# Altium PCB Game Joystick 510.PcbDoc (part 1 of 2)
Units mil, origin at the board's own origin, x right, y up, seen from the top; angles counter-clockwise.
Board outline 4889.97 x 4392.01 mil, 2 copper layers (Top Layer, Bottom Layer); 77 components, 82 nets, 383 pads, 99 vias.
Unrouted connection lines stored in the file: 79.
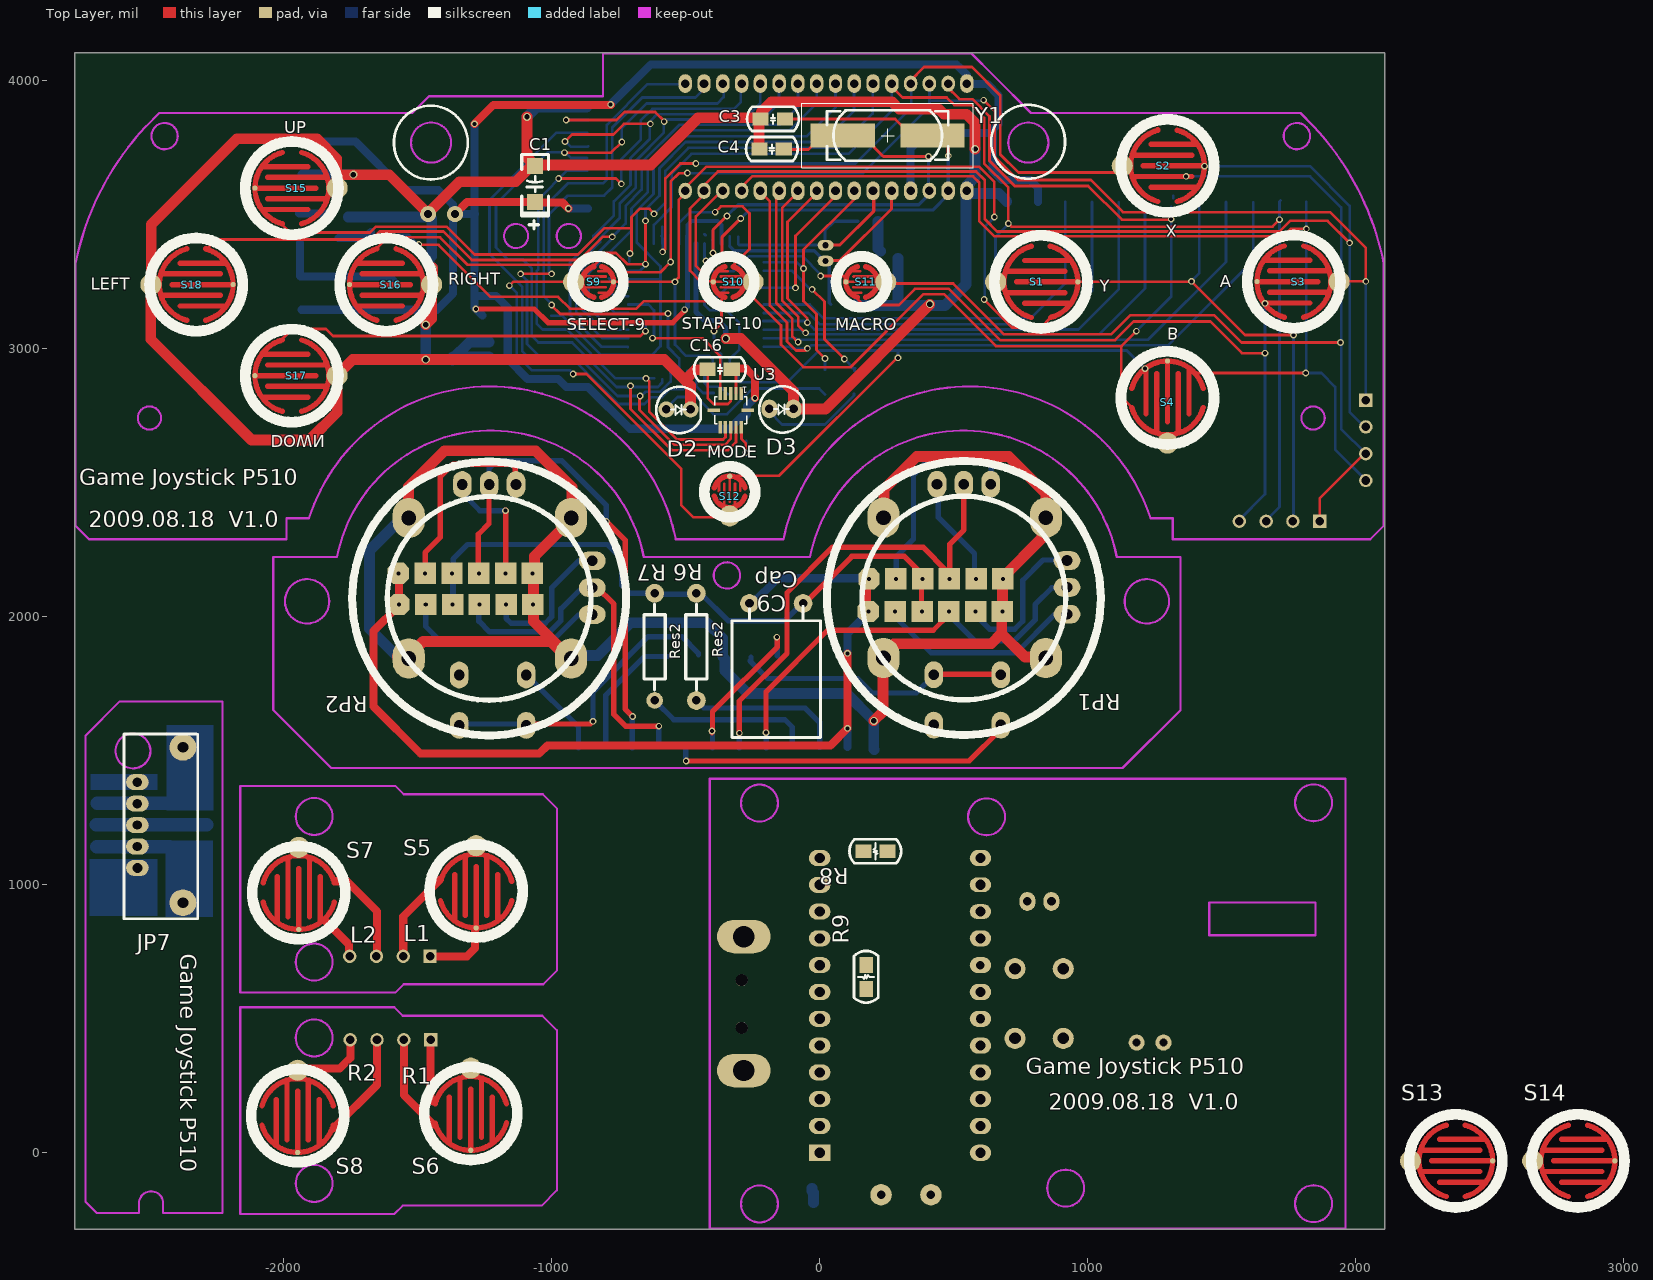
[diagram p0: Top Layer view]
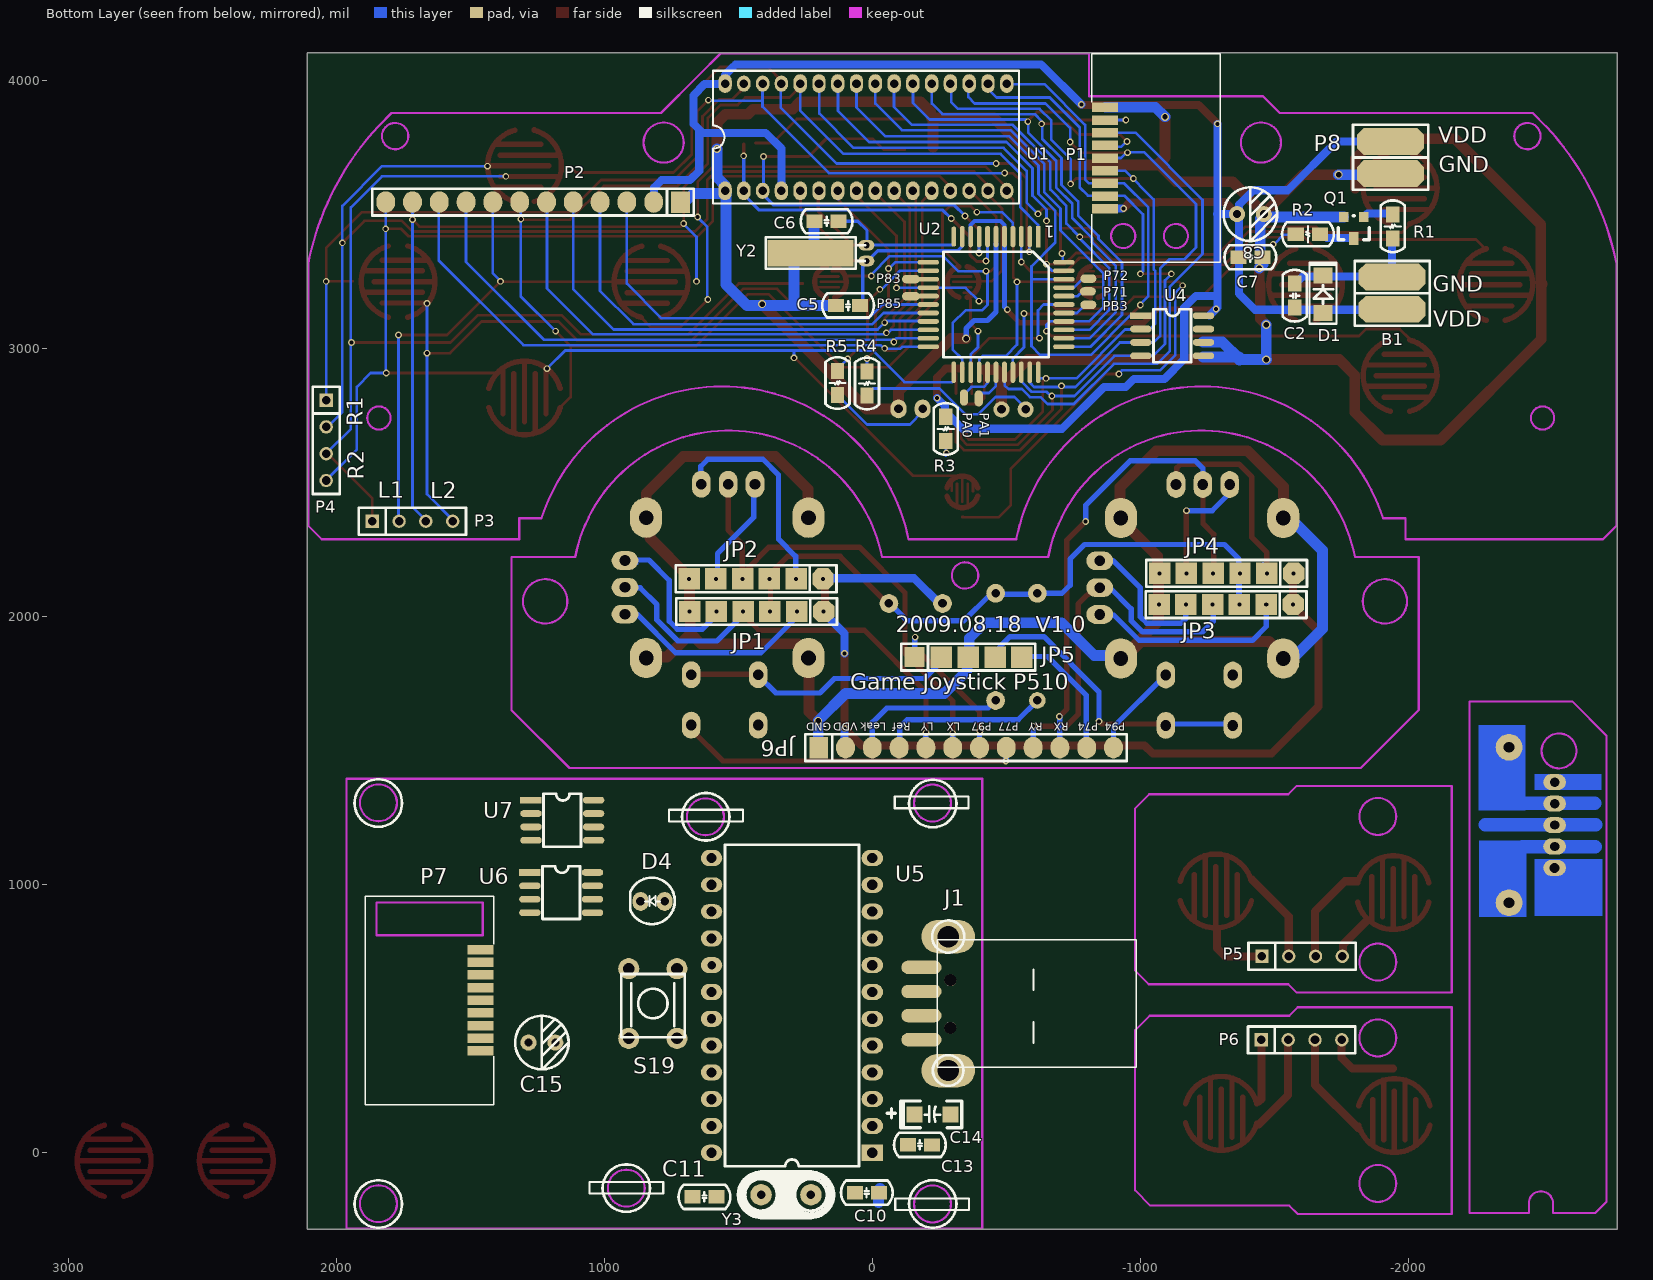
[diagram p1: Bottom Layer view, seen from below]

## Layer stack, top to bottom
Top Layer: signal copper 1.4
Dielectric: dielectric 12.6, FR-4, Dk 4.8
Bottom Layer: signal copper 1.4

## Board outline
-2780.8,-286 2109.17,-286 2109.17,4106.01 -2780.8,4106.01

## Design rules (kind name [scope] priority, off if disabled: settings)
Clearance [All] p1: gap=8
ComponentClearance [All] p1: gap=2 collisioncheckmode=3 verticalgap=10 showdistances=FALSE
FanoutControl Fanout_LCC [All] p1 off: bgadir=Out bgaviamode=Centered fanoutstyle=Auto fanoutdirection=Alternating viagrid=1 // Protel DXP Scope 1 Expression Was: IsLCC   Fanout_LCC (Default Rule)
FanoutControl Fanout_BGA [All] p2 off: bgadir=Out bgaviamode=Centered fanoutstyle=Auto fanoutdirection=Alternating viagrid=1 // Protel DXP Scope 1 Expression Was: IsBGA   Fanout_BGA (Default Rule)
FanoutControl Fanout_SOIC [All] p3 off: bgadir=Out bgaviamode=Centered fanoutstyle=Auto fanoutdirection=Alternating viagrid=1 // Protel DXP Scope 1 Expression Was: IsSOIC   Fanout_SOIC (Default Rule)
FanoutControl Fanout_Default [All] p4: bgadir=Out bgaviamode=Centered fanoutstyle=Auto fanoutdirection=Alternating viagrid=1 // Fanout_Default (Default Rule)
FanoutControl Fanout_Small [All] p5 off: bgadir=Out bgaviamode=Centered fanoutstyle=Auto fanoutdirection=Alternating viagrid=1 // Protel DXP Scope 1 Expression Was: (CompPinCount < 5)   Fanout_Small (Default Rule)
PolygonConnect [All] p1: connectstyle=Relief reliefconductorwidth=10 reliefentries=4 polygonreliefangle="90 Angle"
RoutingVias [All] p1: holewidth=15 width=25 viastyle="Through Hole" minholewidth=15 minwidth=25 maxholewidth=20 maxwidth=30
SilkscreenOverComponentPads [All] p1: minsilkscreentomaskgap=10
SolderMaskExpansion [All] p1: expansion=4
TestPointUsage [All] p1: valid=0 allowmultiple=FALSE
Testpoint [All] p1: side=15 testpointundercomponent=TRUE minsize=40 maxsize=100 preferedsize=60 minholesize=0 maxholesize=40 preferedholesize=32 testpointgrid=1 style=1023 order=0123456789
Width [All] p1: maxlimit=50 minlimit=8 preferedwidth=10
17 further rules are at their usual default settings.

## Classes and differential pairs
component class EM78P510_EM198810: B1 C1 C2 C3 C4 C5 C6 C7 C8 C16 D1 D2 D3 JP7 P1 P2 P3 P4 P5 P6 P8 Q1 R1 R2 R3 R4 R5 S1 S2 S3 S4 S5 S6 S7 S8 S9 S10 S11 S12 S13 S14 S15 S16 S17 S18 u1 U2 U3 U4 Y1 Y2
component class "Game Joystick rocker": C9 JP1 JP2 JP3 JP4 JP5 JP6 R6 R7 RP1 RP2
component class EM78M611RX: C10 C11 C12 C13 C14 C15 D4 J1 P7 R8 R9 S19 U5 U6 U7 Y3

## Components (designator, comment, footprint, x,y, rotation, side; value= is the part's Value field where it differs from the comment)
B1 "Motor" SIP2 -1940.06,3158.01 r90 bottom
C1 "Cap Pol1" C1206-2 -1062.06,3548.01 r90 top
C2 "Cap" C0805 -1576.06,3244.01 r270 bottom
C3 "Cap" C0805 -220.06,3858.01 r0 top
C4 "Cap" C0805 -224.06,3746.01 r0 top
C5 "Cap" C0805 135.94,3162.01 r180 bottom
C6 "Cap" C0805 215.94,3476.01 r180 bottom
C7 "Cap" C0805 -1456.06,3342.01 r0 bottom
C8 "Cap Pol1" RB5 -1360.9,3502.76 r180 bottom
C9 "Cap" CAPL -162,2050 r0 top
C10 "Cap" c0805 -24.9,-148.76 r0 bottom
C11 "Cap" c0805 581.1,-164.76 r0 bottom
C13 "Cap" c0805 -222.9,29.24 r0 bottom
C14 "Cap Pol1" C1206-2 -156.9,143.24 r180 bottom
C15 "Cap Pol1" RB5 1283.1,411.24 r180 bottom
C16 "Cap" C0805 -418.06,2924 r0 top
D1 "4148" D1407 -1682.06,3134.01 r90 bottom
D2 "LED1" led-3#1 -482,2774 r180 top locked
D3 "LED2" LED-3 -97.67,2776.03 r180 top locked
D4 "LED" led-3#2 865,937.9 r180 bottom
J1 "353576-1" USBSD -208.06,702.01 r0 bottom locked
JP1 "HEADER 6" SIP6 182,2020 r0 bottom
JP2 "HEADER 6" SIP6 184,2142 r0 bottom
JP3 "HEADER 6" SIP6 -1570,2046 r0 bottom
JP4 "HEADER 6" SIP6 -1572,2162 r0 bottom
JP5 "HEADER 5" SIP5 -158,1850 r180 bottom
JP6 "Header 12" SIP12 200,1512 r180 bottom
JP7 "HEADER 7" CON5 -2546.19,1063.04 r180 top
P1 "Header 9H" RFM -868.06,3523.22 r90 bottom
P2 "Header 12" SIP12 716,3548 r0 bottom
P3 "L1L2" SIP4 1866,2356.76 r180 bottom
P4 "R1R2" SIP4 2038,2808.76 r270 bottom
P5 "L1L2" SIP4 -1454,733.34 r180 bottom
P6 "R1R2" SIP4 -1452,421.34 r180 bottom
P7 "Header 9H" rfm 1462,758 r270 bottom
P8 "POWER" SIP2 -1934.06,3764.01 r270 bottom
Q1 "8050" SOT-23 -1834.06,3492.01 r0 bottom
R1 "Res2" R0805 -1942.06,3412.01 r90 bottom
R2 "Res2" R0805 -1580.06,3428.01 r180 bottom
R3 "Res2" R0805 -274,2746.76 r270 bottom
R4 "Res2" R0805 19.94,2916.01 r270 bottom
R5 "Res2" R0805 129.94,2918.01 r270 bottom
R6 "Res2" AXIAL0.4#1 -460,1688 r90 top
R7 "Res2" AXIAL0.4#2 -616,1688 r90 top
R8 "Res2" R0805 253.1,1125.24 r180 top
R9 "Res2" R0805 173.1,611.24 r90 top
RP1 "Rocker" Rocker 238,2370 r180 top locked
RP2 "Rocker" Rocker -1533.4,2368.9 r180 top locked
S1 "Y" KeyPad1#1 963.35,3250.03 r0 top locked
S2 "X" KeyPad1#2 1435.8,3683.1 r0 top locked
S3 "A" KeyPad1#3 1631.8,3251.1 r180 top locked
S4 "B" KeyPad1#4 1298,2954.76 r90 top locked
S5 "L1-5" KeyPad1#5 -1282,839.24 r270 top
S6 "R1-6" KeyPad1#6 -1302,9.24 r270 top
S7 "L2-7" KeyPad1#6 -1944,833.24 r270 top
S8 "R2-8" KeyPad1#6 -1948,1.24 r270 top
S9 "SELECT-9" KeyPad2#1 -769.65,3250.03 r0 top locked
S10 "START-10" KeyPad2#2 -397,3250 r180 top
S11 "MACRO" KeyPad2#3 98.06,3250.03 r180 top locked
S12 "MODE" KeyPad2#4 -335.8,2524.83 r90 top locked
S13 "LSW1" KeyPad1#6 2511.46,-30.07 r0 top
S14 "RSW2" KeyPad1#6 2967.46,-30.07 r0 top
S15 "UP" KeyPad1#6 -2107.51,3599.95 r180 top locked
S16 "RIGHT" KeyPad1#6 -1754.6,3239.95 r180 top locked
S17 "DOWN" KeyPad1#6 -2107.51,2899.95 r180 top locked
S18 "LEFT" KeyPad1#1 -2189.01,3239.95 r0 top locked
S19 "RES" SW-PB 729,687 r270 bottom locked
U1 "EM78P510" SDIP32 549.51,3590.03 r180 bottom locked
U2 "EM78P510" QFP44 -462.06,3166.01 r0 bottom locked
U3 "BA020" LCC12 -332,2770.76 r180 top locked
U4 "93C46" SOP8 -1002.06,3124.01 r270 bottom
U5 "EM78M611" DIP24 0,0 r0 bottom locked
U6 "24C02" sop8 1277.94,1046.01 r270 bottom
U7 "93C46" sop8 1273.94,1316.01 r270 bottom
Y1 "4M" XTAL1 345.94,3796.01 r180 top
Y2 "32768" XTAL2 21.94,3328.01 r90 bottom
Y3 "6M" CRY 229.1,-156.76 r0 bottom

## Footprints (in the part's own frame and the unit in brackets; to place one, negate y for a bottom-side part, rotate by r counter-clockwise, add the part's x,y. Pads: shape width x height; smd on the part's side, far side on the other; paste and mask are expansions set on the pad)
AXIAL0.4#1 [mil]
  round 70 hole 32: 1(0,0) 2(400,0)
  silkscreen extent 40,-40 360,40
AXIAL0.4#2 [mil]
  round 62 hole 32: 1(0,0)
  round 70 hole 32: 2(400,0)
  silkscreen extent 40,-40 360,40
C0805 [mil]
  rect 60x50 smd: 1(0,0) 2(90.01,-0.01)
  silkscreen extent -51,-45 142,45
c0805 [mil]
  rect 60x50 smd: 1(0,0) 2(90.01,-0.01)
  silkscreen extent -51,-45 142,45
C1206-2 [mil]
  rect 60x60 smd: 1(0,0) 2(135,0)
  silkscreen extent -101,-50 177,50
CAPL [mil]
  round 70 hole 32: 1(100,0) 2(-100,0)
  silkscreen extent -165,-500 165,-10
CON5 [mil]
  oval 85x60 hole 38: 1(0,0)
  oval 85x60 hole 35: 2(0,-80) 3(0,-160) 4(0,-240) 5(0,-320)
  round 100 hole 40: 6(-170,130) 7(-170,-450)
  silkscreen extent -225,-500 50,190
CRY [mil]
  round 80 hole 32: 1(0,0) 2(186,0)
  silkscreen extent -85,-85 271,85
D1407 [mil]
  rect 60x70 smd: 1(0,0) 2(140,0)
  silkscreen extent -40,-50 188,50
DIP24 [mil]
  rect 80x60 hole 38: 1(0,0)
  oval 80x60 hole 38: 2(0,-100) 3(0,-200) 4(0,-300) 5(0,-400) 6(0,-500) 7(0,-600) 8(0,-700) 9(0,-800) 10(0,-900) 11(0,-1000) 12(0,-1100) 13(600,-1100) 16(600,-800) 18(600,-600) 20(600,-400) 21(600,-300) 22(600,-200) 23(600,-100) 24(600,0)
  oval 80x55 hole 38: 14(600,-1000) 15(600,-900)
  oval 80x60 hole 32: 17(600,-700)
  oval 80x60 hole 35: 19(600,-500)
  silkscreen extent 50,-1150 550,50
KeyPad1#1 [mm]
  round 0.5 smd: 1(0,0)
  round 2 smd: 2(-7.79,0)
  Top Layer lines w0.508: -6.675,-1.016 -1.214,-1.016 ; -6.675,1.016 -1.214,1.016 ; -5.786,0 -0.071,0 ; -5.024,-2.032 -0.796,-2.032 -0.706,-2.032 ; -5.024,2.032 -0.706,2.032 ; -4.409,-3.38 cw(c-3.5,0) -4.409,3.38 ; -2.597,3.381 cw(c-3.5,0) 0,0 cw(c-3.5,0) -0.674,-2.064 cw(c-3.5,0) -0.742,-2.155 cw(c-3.5,0) -0.796,-2.223 cw(c-3.5,0) -1.723,-3.016 cw(c-3.5,0) -2.198,-3.249 cw(c-3.5,0) -2.536,-3.365 cw(c-3.5,0) -2.591,-3.38
  silkscreen extent -7.91,-4.41 0.91,4.41
KeyPad1#2 [mm]
  round 0.5 smd: 1(0,0)
  round 2 smd: 2(-7.79,0)
  Top Layer lines w0.508: -6.675,-1.016 -1.723,-1.016 -1.214,-1.016 ; -6.675,1.016 -1.214,1.016 ; -5.786,0 -0.071,0 ; -5.024,-2.032 -0.796,-2.032 -0.706,-2.032 ; -5.024,2.032 -0.706,2.032 ; -4.409,-3.38 cw(c-3.5,0) -4.409,3.38 ; -2.597,3.381 cw(c-3.5,0) 0,0 cw(c-3.5,0) -0.674,-2.064 cw(c-3.5,0) -0.742,-2.155 cw(c-3.5,0) -0.796,-2.223 cw(c-3.5,0) -1.723,-3.016 cw(c-3.5,0) -2.198,-3.249 cw(c-3.5,0) -2.591,-3.38
  silkscreen extent -7.91,-4.41 0.91,4.41
KeyPad1#3 [mm]
  round 0.5 smd: 1(0,0)
  round 2 smd: 2(-7.79,0)
  Top Layer lines w0.508: -0.071,0 -5.786,0 ; -0.706,2.032 -0.766,2.032 -0.794,2.032 -2.849,2.032 -5.024,2.032 ; -0.706,-2.032 -0.796,-2.032 -5.024,-2.032 ; -1.214,1.016 -6.675,1.016 ; -1.214,-1.016 -6.675,-1.016 ; -2.591,-3.38 ccw(c-3.5,0) -2.198,-3.249 ccw(c-3.5,0) -1.723,-3.016 ccw(c-3.5,0) -0.796,-2.223 ccw(c-3.5,0) -0.742,-2.155 ccw(c-3.5,0) -0.674,-2.064 ccw(c-3.5,0) 0,0 ccw(c-3.5,0) -2.597,3.381 ; -4.409,3.38 ccw(c-3.5,0) -4.409,-3.38
  silkscreen extent -7.91,-4.41 0.91,4.41
KeyPad1#4 [mm]
  round 0.5 smd: 1(0,0)
  round 2 smd: 2(-7.79,0)
  Top Layer lines w0.508: -2.597,3.381 cw(c-3.5,0) 0,0 cw(c-3.5,0) -0.674,-2.064 cw(c-3.5,0) -0.742,-2.155 cw(c-3.5,0) -0.796,-2.223 cw(c-3.5,0) -1.137,-2.582 cw(c-3.5,0) -1.723,-3.016 cw(c-3.5,0) -2.198,-3.249 cw(c-3.5,0) -2.591,-3.38 ; -4.409,3.38 ccw(c-3.5,0) -4.414,3.378 ccw(c-3.5,0) -4.409,-3.38 ; -5.024,2.032 -0.73,2.032 -0.706,2.032 ; -6.675,1.016 -1.214,1.016 ; -5.786,0 -0.071,0 ; -6.675,-1.016 -1.214,-1.016 ; -5.024,-2.032 -0.796,-2.032 -0.706,-2.032
  silkscreen extent -7.91,-4.41 0.91,4.41
KeyPad1#5 [mm]
  round 0.5 smd: 1(0,0)
  round 2 smd: 2(-7.79,0)
  Top Layer lines w0.508: -2.591,-3.38 ccw(c-3.5,0) -2.198,-3.249 ccw(c-3.5,0) -1.723,-3.016 ccw(c-3.5,0) -0.796,-2.223 ccw(c-3.5,0) -0.742,-2.155 ccw(c-3.5,0) -0.674,-2.064 ccw(c-3.5,0) 0,0 ccw(c-3.5,0) -2.597,3.381 ; -4.409,-3.38 cw(c-3.5,0) -4.409,3.38 ; -0.706,-2.032 -0.742,-2.032 -0.796,-2.032 -5.024,-2.032 ; -1.214,-1.016 -6.675,-1.016 ; -0.071,0 -5.786,0 ; -1.214,1.016 -6.675,1.016 ; -0.706,2.032 -5.024,2.032
  silkscreen extent -7.91,-4.41 0.91,4.41
KeyPad1#6 [mm]
  round 0.5 smd: 1(0,0)
  round 2 smd: 2(-7.79,0)
  Top Layer lines w0.508: -2.591,-3.38 ccw(c-3.5,0) -2.198,-3.249 ccw(c-3.5,0) -1.723,-3.016 ccw(c-3.5,0) -0.796,-2.223 ccw(c-3.5,0) -0.742,-2.155 ccw(c-3.5,0) -0.674,-2.064 ccw(c-3.5,0) 0,0 ccw(c-3.5,0) -2.597,3.381 ; -4.409,-3.38 cw(c-3.5,0) -4.409,3.38 ; -0.706,-2.032 -0.796,-2.032 -5.024,-2.032 ; -1.214,-1.016 -6.675,-1.016 ; -0.071,0 -5.786,0 ; -1.214,1.016 -6.675,1.016 ; -0.706,2.032 -5.024,2.032
  silkscreen extent -7.91,-4.41 0.91,4.41
KeyPad2#1 [mm]
  round 0.5 smd: 1(0,0)
  round 2 smd: 2(-3.77,0)
  Top Layer lines w0.254: -3.004,-0.508 -0.718,-0.508 ; -3.004,0.508 -0.718,0.508 ; -2.394,0 0,0 0.02,0 0.044,0 ; -1.421,1.016 -0.376,1.016 -0.337,1.016 ; -1.37,-1.016 -0.458,-1.016 -0.407,-1.016 -0.376,-1.016 -0.337,-1.016
  Top Layer lines w0.508: -1.87,-1.449 cw(c-1.48,0) -1.941,1.428 cw(c-1.48,0) -1.87,1.449 ; -1.093,1.449 cw(c-1.48,0) -0.376,1.016 cw(c-1.48,0) 0.02,0 cw(c-1.48,0) -0.376,-1.016 cw(c-1.48,0) -0.407,-1.048 cw(c-1.48,0) -0.416,-1.057 cw(c-1.48,0) -1.09,-1.449
  silkscreen extent -3.89,-2.41 0.93,2.41
KeyPad2#2 [mm]
  round 0.5 smd: 1(0,0)
  round 2 smd: 2(-3.77,0)
  Top Layer lines w0.254: 0.044,0 0.027,0 0.02,0 0,0 -2.394,0 ; -0.337,1.016 -0.376,1.016 -1.421,1.016 ; -0.337,-1.016 -0.376,-1.016 -0.407,-1.016 -0.458,-1.016 -1.37,-1.016 ; -0.718,0.508 -3.004,0.508 ; -0.718,-0.508 -3.004,-0.508
  Top Layer lines w0.508: -1.09,-1.449 ccw(c-1.48,0) -0.416,-1.057 ccw(c-1.48,0) -0.407,-1.048 ccw(c-1.48,0) -0.376,-1.016 ccw(c-1.48,0) 0.02,0 ccw(c-1.48,0) -0.376,1.016 ccw(c-1.48,0) -1.031,1.431 ccw(c-1.48,0) -1.093,1.449 ; -1.87,1.449 ccw(c-1.48,0) -2.034,-1.394 ccw(c-1.48,0) -1.87,-1.449
  silkscreen extent -3.89,-2.41 0.93,2.41
KeyPad2#3 [mm]
  round 0.5 smd: 1(0,0)
  round 2 smd: 2(-3.77,0)
  Top Layer lines w0.254: 0.044,0 -2.394,0 ; -0.337,1.016 -0.376,1.016 -1.421,1.016 ; -0.337,-1.016 -0.376,-1.016 -0.404,-1.016 -0.407,-1.016 -0.454,-1.016 -0.458,-1.016 -1.37,-1.016 ; -0.718,0.508 -3.004,0.508 ; -0.718,-0.508 -3.004,-0.508
  Top Layer lines w0.508: -1.09,-1.449 ccw(c-1.48,0) -0.416,-1.057 ccw(c-1.48,0) -0.407,-1.048 ccw(c-1.48,0) -0.376,-1.016 ccw(c-1.48,0) -0.258,-0.87 ccw(c-1.48,0) -0.376,1.016 ccw(c-1.48,0) -1.093,1.449 ; -1.87,1.449 ccw(c-1.48,0) -1.87,-1.449
  silkscreen extent -3.89,-2.41 0.93,2.41
KeyPad2#4 [mm]
  round 0.5 smd: 1(0,0)
  round 2 smd: 2(-3.77,0)
  Top Layer lines w0.254: -1.421,1.016 -0.376,1.016 -0.337,1.016 ; -3.004,0.508 -0.718,0.508 ; -2.394,0 0,0 0.02,0 0.044,0 ; -3.004,-0.508 -0.718,-0.508 ; -1.37,-1.016 -0.458,-1.016 -0.407,-1.016 -0.376,-1.016 -0.337,-1.016
  Top Layer lines w0.508: -1.87,1.449 ccw(c-1.48,0) -1.87,-1.449 ; -1.093,1.449 cw(c-1.48,0) -0.376,1.016 cw(c-1.48,0) 0.02,0 cw(c-1.48,0) -0.376,-1.016 cw(c-1.48,0) -0.407,-1.048 cw(c-1.48,0) -0.416,-1.057 cw(c-1.48,0) -1.09,-1.449
  silkscreen extent -3.89,-2.41 0.93,2.41
LCC12 [mm]
  rect 0.32x1.2 smd: 1(-1,-1.6) 2(-0.5,-1.6) 3(0,-1.6) 4(0.5,-1.6) 5(1,-1.6) 6(1,1.6) 7(0.5,1.6) 8(0,1.6) 9(-0.5,1.6) 10(-1,1.6)
  rect 1.2x0.32 smd: 11(-1.6,0) 12(1.6,0)
  silkscreen extent -1.52,-1.3 1.52,1.27
led-3#1 [mil]
  round 60 hole 32.01: 1(90,0) 2(0,0)
  silkscreen extent -38,-85 128,89
led-3#2 [mil]
  oval 60x70 hole 32.01: 1(90,0) 2(0,0)
  silkscreen extent -38,-85 128,89
LED-3 [mil]
  oval 60x70 hole 32.01: 1(90,0) 2(0,0)
  silkscreen extent -38,-85 128,89
QFP44 [mm]
  rect 0.45x2.032 smd: 1(-3.988,-6.43)
  oval 0.45x2.032 smd: 2(-3.188,-6.43) 3(-2.388,-6.43) 4(-1.588,-6.43) 5(-0.788,-6.43) 6(0.012,-6.43) 7(0.812,-6.43) 8(1.612,-6.43) 9(2.412,-6.43) 10(3.212,-6.43) 23(4.013,6.43) 24(3.213,6.43) 25(2.413,6.43) 26(1.613,6.43) 27(0.813,6.43) 28(0.013,6.43) 29(-0.787,6.43) 30(-1.587,6.43) 31(-2.387,6.43) 32(-3.187,6.43) 33(-3.987,6.43)
  oval 0.45x1.905 smd: 11(4.012,-6.43)
  oval 2.032x0.45 smd: 12(6.43,-3.988) 13(6.43,-3.188) 14(6.43,-2.388) 15(6.43,-1.588) 16(6.43,-0.788) 17(6.43,0.012) 18(6.43,0.812) 19(6.43,1.612) 20(6.43,2.412) 21(6.43,3.212) 22(6.43,4.012) 34(-6.422,4.011) 35(-6.422,3.212) 36(-6.422,2.412) 37(-6.422,1.612) 38(-6.422,0.812) 39(-6.422,0.012) 40(-6.422,-0.788) 41(-6.422,-1.588) 42(-6.422,-2.388) 43(-6.422,-3.188) 44(-6.422,-3.988)
  silkscreen extent -5,-4.99 4.99,5.01
R0805 [mil]
  rect 60x50 smd: 1(0,0) 2(90,0)
  silkscreen extent -51,-45 142,45
RB5 [mil]
  round 60 hole 30: 1(0,0) 2(100,0)
  silkscreen extent -50,-100 150,100
RFM [mm]
  rect 0.9x2.5 smd: 1(0,0) 2(1.2,0) 3(2.4,0) 4(3.6,0) 5(4.8,0) 6(6,0) 7(7.2,0) 8(8.4,0) 9(9.6,0)
  silkscreen extent -5.08,-10.92 14.68,1.27
rfm [mm]
  rect 0.9x2.5 smd: 1(0,0) 2(1.2,0) 3(2.4,0) 4(3.6,0) 5(4.8,0) 6(6,0) 7(7.2,0) 8(8.4,0) 9(9.6,0)
  silkscreen extent -5.08,-10.92 14.68,1.27
Rocker [mil]
  oval 100x70 hole 40: 1(-685,360) 2(-685,260) 3(-685,160)
  oval 70x100 hole 40: 4(-400,-125) 5(-300,-125) 6(-200,-125) 7(-188.01,585.98) 8(-438,586) 9(-188,774) 10(-438,774)
  oval 120x150 hole 55: 11(-606,524) 12(-606,0) 13(0,0) 14(0,524)
  silkscreen extent -811,-211 211,811
SDIP32 [mil]
  oval 50x70 hole 32: 1(0,0) 2(70.08,0) 4(210.24,0) 5(280.32,0) 6(350.39,0) 7(420.47,0) 8(490.55,0) 9(560.63,0) 10(630.71,0) 11(700.79,0) 12(770.87,0)
  oval 50x60 hole 32: 3(140.16,0) 13(840.94,0) 14(911.02,0) 15(981.1,0) 16(1051.18,0)
  oval 50x70 hole 32.01: 17(1051.18,400) 18(981.1,400) 19(911.02,400) 20(840.94,400) 21(770.87,400) 22(700.79,400) 23(630.71,400) 24(560.63,400) 25(490.55,400) 26(420.47,400) 27(350.39,400) 28(280.31,400) 32(0,400)
  oval 50x60 hole 32.01: 29(210.24,400) 30(140.16,400) 31(70.08,400)
  silkscreen extent -45,-48 1096,448
SIP2 [mil]
  oct 100x250 smd: 1(-10,0) 2(110,0)
  silkscreen extent -72,-140 170,140
SIP4 [mil]
  rect 50x50 hole 32: 1(0,0)
  round 50 hole 32: 2(100,0) 3(200,0) 4(300,0)
  silkscreen extent -50,-50 350,50
SIP5 [mil]
  rect 75x75 smd: 1(0,0)
  rect 80x80 smd: 2(100,0) 3(200,0) 4(300,0) 5(400,0)
  silkscreen extent -50,-50 450,50
SIP6 [mil]
  oct 80x80 hole 15: 1(0,0)
  rect 80x80 hole 15: 2(100,0) 3(200,0) 4(300,0) 5(400,0) 6(500,0)
  silkscreen extent -50,-50 550,50
SIP12 [mil]
  rect 70x80 smd: 1(0,0)
  oval 70x80 smd: 2(100,0) 3(200,0) 4(300,0) 5(400,0) 6(500,0) 7(600,0) 8(700,0) 9(800,0) 10(900,0) 11(1000,0) 12(1100,0)
  silkscreen extent -50,-50 1150,50
SOP8 [mil]
  rect 25x80 smd: 1(0,0)
  oval 25x80 smd: 2(50,0) 3(100,0) 4(150,0) 5(150,233.78) 6(100,233.78) 7(50,233.78) 8(0,233.78)
  silkscreen extent -23,47 173,187
sop8 [mil]
  rect 25x80 smd: 1(0,0)
  oval 25x80 smd: 2(50,0) 3(100,0) 4(150,0) 5(150,233.78) 6(100,233.78) 7(50,233.78) 8(0,233.78)
  silkscreen extent -23,47 173,187
SOT-23 [mil]
  rect 36x36 smd: 1(0,0) 3(75,0)
  rect 36x50 smd: 2(38,80)
  silkscreen extent -20,-5 95,85
SW-PB [mm]
  round 2 hole 1.1: 1(0,0) 1(6.604,0) 2(0,-4.572) 2(6.604,-4.572)
  silkscreen extent 0.5,-5.27 6.5,0.73
USBSD [mil]
  oval 150x50 smd: 1(25,280) 2(25,190) 3(25,100) 4(25,10)
  oval 200x125 hole 80: 5(-75,-105) 6(-75,395)
  round 45 hole 45: ""(-82.68,57.87) ""(-82.68,235.83)
  silkscreen extent -777,-165 -15,452
XTAL1 [mil]
  rect 240x90 smd: 1(-75,0) 2(260,0)
  silkscreen extent -228,-120 412,120
XTAL2 [mm]
  oval 1x1.5 hole 0.6: 1(0,0) 2(1.5,0)
  rect 2.5x8.128 smd: ""(0.75,5.305)
  silkscreen extent -0.75,0.1 2.25,9.56

## Part data
S13 S14: library part SW-PB, "Switch"

## Free pads (board coordinates)
  oval 60x31.5 smd far side: 0(-806,3262.35) 1(-804,3214.35) 2(-806,3164.35)
  oval 31.5x60 smd far side: 3(-342,2818.35) 4(-396.9,2815.24)
  oval 66.93x31.5 smd far side: 5(-144,3260.35) 6(-144,3196.35)

## Via types
v1: diameter 25, hole 15, Top Layer to Bottom Layer, 90 vias
v2: diameter 30, hole 20, Top Layer to Bottom Layer, 9 vias

## Nets (pads, with @x,y where several pads share a name; then routed paths per layer and width w, separated by ;. In a path a pad name is that pad's centre, name@x,y a point inside that pad or via, vN(x,y) a via of type N, cw(c..) or ccw(c..) an arc to the next point about the centre after c; other vN are vias at no path point)
1: JP7.1
3: JP7.3 | length 432.1
  Bottom Layer w50: -2700.06,1224.55 JP7.3@-2538,1224 ; JP7.3@-2558,1224 -2288,1224
5: JP7.5
93C46_CS_P73: U1.25 U2.42 U4.1 | length 2194.6
  Bottom Layer w10: U4.1@-1002.06,3124.01 -961.66,3124.01 -815.66,2978.01 -626.05,2978.01 -594.06,3010 -594.06,3308.01 -682.06,3396.01 -682.06,3516.01 -620.06,3578.01 -620.06,3684.01 -510.06,3794.01 -48.06,3794.01 58.96,3901.02 U1.25@58.96,3990.03 ; U2.42@-714.91,3260.02 -596.06,3260.02
BM020_CBS_P70: U2.39 U3.5 | length 632.1
  Top Layer w10: v1(-624.06,3040.01) -438.06,3040.01 -371.37,2973.32 U3.5@-371.37,2833.75
  Bottom Layer w10: U2.39@-714.91,3165.53 -639.58,3165.53 -618.06,3144.01 -618.06,3046.01 v1(-624.06,3040.01)
FIFO_FLAG_P65: P7.7 U5.19
FIFO_FLAG_PA2: P1.7 U2.29 | length 1863.4
  Bottom Layer w10: P1.7@-868.06,3806.68 -981.38,3806.68 -1232.06,3556.01 -1232.06,3354.01 -1110.06,3232.01 -1110.06,2992.01 -1062.06,2944.01 -901.66,2944.01 -751.66,2794.01 -654.05,2794.01 -628.06,2820 -588.06,2820 -558.06,2850.01 -508.06,2850.01 -494.06,2864.01 U2.29@-494.06,2918.01
GND: C1.2 C3.1 C4.1 C5.1 C6.1 C7.1 C8.2 C10.1 C11.2 C13.1 C14.2 C15.2 C16.1 D2.2 D3.2 D4.2 J1.4 J1.5 J1.6 JP1.6 JP2.6 JP3.6 JP4.6 JP5.3 JP6.1 JP7.2 JP7.4 JP7.6 JP7.7 P1.9 P2.1 P7.9 P8.2 Q1.3 RP1.11 RP1.12 RP1.13 RP1.14 RP2.11 RP2.12 RP2.13 RP2.14 S15.2 S16.2 S17.2 S18.2 S19.1@729,427 U1.1 U2.6 U3.3 U4.5 U4.6 U5.2 U5.9 U6.1 U6.2 U6.3 U6.4 U7.5 U7.6 Y2. | length 19010.2
  Top Layer w10: -482.06,2808 D2.2@-468.06,2794 ; C16.1@-418.06,2922 -418.06,2816 -396.06,2794 -342.06,2794 -335.72,2800.34 -332,2804.06 U3.3@-332,2833.75
  Top Layer w40: S18.2@-2500.06,3242.01 -2494.06,3248.01 -2494.06,3464.01 -2174.06,3784.01 -1876.06,3784.01 -1802.06,3710.01 S15.2@-1802.06,3600.01 ; S18.2@-2496.06,3230.01 -2496.06,3036.01 -2120.06,2660.01 -1904.06,2660.01 -1800.06,2764.01 -1800.06,2902.01 -1742.06,2960.01 -580.06,2960.01 -482.06,2862 D2.2@-482,2774 ; -1796.06,3650.01 v2@-1742.06,3650.01 ; v2(-1740.06,3650.01) -1606.06,3650.01 C8.2@-1466.06,3510.01 ; RP2.14@-1576.06,1852.01 RP2.14@-1542.06,1852.01 ; RP2.14@-1536.06,1852.01 -1480.06,1908.01 -1004.06,1908.01 RP2.11@-936.06,1840.01 ; RP2.13@-1534.06,2376.01 -1534.06,2486.01 -1400.06,2620.01 -1060.06,2620.01 -924.06,2484.01 RP2.12@-924.06,2364.01 ; v2(-1470.06,3090.01) -1447.91,3112.16 S16.2@-1447.91,3239.95 ; C8.2@-1462.06,3506.01 -1344.06,3624.01 -1134.06,3624.01 C1.2@-1074.06,3684.01 ; S16.2@-1444.06,3256.01 v2(-1444.06,3302.01) ; v2(-1092.06,3866.01) -1092.06,3714.01 C1.2@-1068.06,3690.01 ; JP4.6@-1068.06,2162.01 -1068.06,1984.01 RP2.11@-926.06,1842.01 ; JP4.6@-1064.06,2166.01 -1064.06,2226.01 RP2.12@-930.06,2360.01 ; C1.2@-1060.06,3686.01 -630.06,3686.01 -454.06,3862.01 C3.1@-220.06,3862.01 ; -498.06,2888 -464.06,2922 C16.1@-418.06,2922 ; v2(-350.06,3038.35) -294.4,3038.35 -98.06,2842 D3.2@-98.06,2780 ; C4.1@-226.06,3752.01 C3.1@-226.06,3854.01 ; C3.1@-218.06,3868.01 -218.06,3884 -180.06,3922 269.94,3922 297.29,3894.65 445.69,3894.65 464.35,3876 547.95,3876 579.94,3844.01 v2(579.94,3746.01) ; D3.2@-97.67,2776.03 21.68,2776.03 410.94,3165.29 v2(410.94,3167.01) ; v2(201.94,1612.01) 235.94,1646.01 RP1.14@235.94,1838.01 ; RP1.14@229.94,1854.01 275.94,1900.01 639.94,1900.01 677.94,1938.01 ; RP1.13@239.94,2384.01 239.94,2476 361.94,2598 705.94,2598 843.94,2460 RP1.12@843.94,2368.01 ; JP1.6@679.94,2022.01 679.94,1936.01 765.94,1850.01 RP1.11@831.94,1850.01 ; JP1.6@682,2020 682,2146.06 829.94,2294.01 RP1.12@829.94,2370.01
  Bottom Layer w20: U2.6@-461.58,3393.16 -461.58,3137.52 -430.06,3106 -380.06,3106 -350.06,3076 v2(-350.06,3038.35)
  Bottom Layer w40: P8.2@-1928.06,3650.01 v2(-1740.06,3650.01) ; Q1.3@-1759.06,3492.01 C8.2@-1474.75,3492.01 ; RP2.14@-1576.06,1852.01 -1680.06,1956.01 -1680.06,2248.01 RP2.13@-1570.06,2358.01 ; v2@-1472.06,2960.01 -1372.06,2960.01 -1306.06,3026.01 U4.6@-1234.06,3026.01 ; v2(-1470.06,2960.01) v2(-1470.06,3090.01) ; C8.2@-1462.06,3500.01 -1448.06,3486.01 C7.1@-1448.06,3346.01 ; C7.1@-1458.06,3344.01 -1458.06,3316.01 v2(-1444.06,3302.01) ; -1370.06,2958.01 -1369.26,2962.81 -1368.06,2970.01 U4.5@-1234.06,2970.01 ; v2(-1092.06,3866.01) -1056.06,3902.01 P1.9@-870.06,3902.01 ; RP2.11@-906.06,1856.01 -828.06,1856.01 -706.06,1978.01 -420.06,1978.01 -362.06,1920.01 JP5.3@-362.06,1852.01 ; JP5.3@-354.06,1844.01 -354.06,1800.01 -268.06,1714.01 99.94,1714.01 v2@199.94,1614.01 ; C10.1@-28.9,-142.76 C10.1@-28.9,-132.76 ; -22.9,-186.76 C10.1@-22.9,-148.76 ; C5.1@135.94,3166.01 139.95,3162 467.65,3162 545.94,3240.29 545.94,3580.01 667.94,3580.01 P2.1@697.94,3550.01 ; v2(201.94,1612.01) 201.94,1506.01 JP6.1@203.94,1504.01 ; C6.1@217.94,3476.01 217.94,3374.01 Y2.@227.94,3364.01 ; 291.94,3176.01 Y2.@291.94,3338.01 ; U1.1@549.94,3592.01 549.94,3610 579.94,3640 v2(579.94,3746.01)
  Bottom Layer w50: -2698,1142 -2425.94,1141.45 ; -2696,1304 -2437.94,1304
IIC_SCI_P54: U5.10 U6.6
IIC_SDA_P55: U5.11 U6.5
LEAKRESIS: JP6.3 P2.3 R6.1 U2.17 | length 2090
  Bottom Layer w10: U2.17@-208.91,3165.53 -37.58,3165.53 13.94,3114.01 785.94,3114.01 916,3244.06 P2.3@916,3548
  Bottom Layer w20: R6.1@-460,1688 -432.01,1660.01 -54.06,1660.01 -0.06,1606.01 JP6.3@-0.06,1514.01
LX_P91/AD2: JP2.4 JP6.6 P2.6 RP1.5 U1.10 U2.20 | length 4146.7
  Top Layer w10: U1.10@-84.06,3582.01 -140,3526.06 -140,3179.94 -80.06,3120 -80.06,3086.4 -53.66,3060.01 v1(-52.06,3060.01)
  Top Layer w20: v1(-300.06,1566.01) -300.06,1686.01 -122.06,1864.01 -122.06,2090.01 47.94,2260.01 385.94,2260.01 JP2.4@475.94,2170.01 ; JP2.4@485.94,2140.01 485.94,2272.01 537.94,2324.01 RP1.5@537.94,2502.01
  Bottom Layer w10: v1(-300.06,1566.01) v1@-300,1565.95 ; U2.20@-208.91,3071.04 -69.09,3071.04 -52.06,3054.01 1041.94,3054.01 1213.94,3226.01 P2.6@1213.94,3548.01
  Bottom Layer w20: JP6.6@-300,1512 v1@-300,1565.95
LY_P90/AD3: JP1.4 JP6.5 P2.5 RP1.2 U1.9 U2.19 | length 3900.1
  Top Layer w10: v1(-46.06,3098.01) -46.06,3114 -120.06,3188 -120.06,3474.01 -16.06,3578.01 U1.9@-16.06,3584.01
  Top Layer w20: v1(-200.06,1568.01) -200.06,1720.01 29.94,1950.01 423.94,1950.01 JP1.4@483.94,2010.01
  Bottom Layer w10: U2.19@-210.06,3104.01 -52.06,3104.01 -20.06,3072.01 965.94,3072.01 1115.94,3222.01 P2.5@1115.94,3546.01 ; v1(-200.06,1568.01) v1@-200,1567.95
  Bottom Layer w20: JP6.5@-200,1512 v1@-200,1567.95 ; JP1.4@473.94,1994.01 495.94,1994.01 579.94,1910.01 725.94,1910.01 803.94,1988.01 803.94,2046.01 865.94,2108.01 RP1.2@925.94,2108.01
NetB1_2: B1.2 C2.1 D1.2 R1.1 | length 495.6
  Bottom Layer w30: B1.2@-1940.06,3272.01 R1.1@-1940.06,3396.01 ; B1.2@-1938.06,3270.01 -1606.06,3270.01 C2.1@-1578.06,3242.01
NetC9_1: C9.1 JP1.3 JP2.3 JP3.3 JP4.3 R6.2 R7.2 | length 2490.1
  Top Layer w10: JP1.3@379.94,2028.01 JP1.3@385.94,2022.01
  Top Layer w20: C9.1@-58.06,2048.01 119.94,2226.01 315.94,2226.01 385.94,2156.01 JP2.3@389.94,2156.01 ; JP1.3@379.94,2028.01 379.94,2130.01 JP2.3@389.94,2140.01
  Bottom Layer w10: JP3.3@-1374.06,2058.01 JP4.3@-1374.06,2166.01
  Bottom Layer w20: JP3.3@-1368.06,2044.01 -1368.06,2216.01 -1314.06,2270.01 -792.06,2270.01 -738.06,2216.01 -738.06,2118.01 -708.06,2088.01 R7.2@-618.06,2088.01 ; R7.2@-620.06,2084.01 -440.06,2084.01 -342.06,1986.01 -130.06,1986.01 C9.1@-60.06,2056.01
NetC10_2: C10.2 U5.1 Y3.1
NetC11_1: C11.1 U5.24 Y3.2
NetD2_1: D2.1 R4.2 | length 695.3
  Bottom Layer w10: D2.1@-580.06,2772.01 -578.06,2772.01 -529.72,2820.35 -460,2820.35 -396,2756.35 -346,2756.35 -250.34,2852.01 -2.06,2852.01 R4.2@19.94,2830.01
NetD3_1: D3.1 R5.2 | length 400.6
  Bottom Layer w10: D3.1@-188.06,2780.01 -188.06,2766.01 -140.06,2718.01 19.94,2718.01 127.94,2826.01 R5.2@127.94,2832.01
NetD4_1: D4.1 R8.1
NetJ1_2: J1.2 U5.5
NetJ1_3: J1.3 U5.4
NetJP1_2: JP1.2 RP1.1 | length 762
  Bottom Layer w20: JP1.2@277.94,2014.01 277.94,2004.01 415.94,1866.01 733.94,1866.01 875.94,2008.01 RP1.1@913.94,2008.01
NetJP1_5: JP1.5 RP1.3 | length 597.3
  Bottom Layer w10: RP1.3@877.94,2198.01 RP1.3@907.94,2198.01
  Bottom Layer w20: JP1.5@571.94,1996.01 591.94,1996.01 633.94,1954.01 727.94,1954.01 757.94,1984.01 757.94,2136.01 833.94,2212.01 RP1.3@925.94,2212.01
NetJP2_2: JP2.2 RP1.4 | length 835.3
  Top Layer w10: RP1.4@639.94,2500.01 RP1.4@639.94,2534.01
  Bottom Layer w20: JP2.2@285.94,2144.01 285.94,2226.01 349.94,2290.01 349.94,2530.01 407.94,2588.01 613.94,2588.01 639.94,2562.01 RP1.4@639.94,2498.01
NetJP2_5: JP2.5 RP1.6 | length 404.3
  Bottom Layer w20: RP1.6@441.94,2498.01 441.94,2372.01 577.94,2236.01 JP2.5@577.94,2150.01
NetJP3_2: JP3.2 RP2.1 | length 766.5
  Bottom Layer w10: JP3.2@-1470,2046 JP3.2@-1470.06,2048.01
  Bottom Layer w20: JP3.2@-1470.06,2048.01 -1470.06,1964.01 -1418.06,1912.01 -996.06,1912.01 -902.06,2006.01 RP2.1@-850.06,2006.01
NetJP3_5: JP3.5 RP2.3 | length 541.6
  Bottom Layer w10: RP2.3@-854.06,2206.01 RP2.3@-846.06,2206.01
  Bottom Layer w20: JP3.5@-1170.06,2044.01 -1170.06,1994.01 -1152.06,1976.01 -1024.06,1976.01 -1000.06,2000.01 -1000.06,2108.01 -898.06,2210.01 RP2.3@-854.06,2210.01
NetJP4_2: JP4.2 RP2.4 | length 830.9
  Top Layer w10: JP4.2@-1462.06,2154.01 JP4.2@-1462.06,2162
  Top Layer w20: JP4.2@-1472.06,2160.01 -1472.06,2240.01 -1416.06,2296.01 -1416.06,2522.01 -1368.06,2570.01 -1150.06,2570.01 -1136.06,2556.01 RP2.4@-1136.06,2502.01
  Bottom Layer w10: JP4.2@-1458.06,2156.01 JP4.2@-1458.06,2200.01 ; RP2.4@-1132.06,2504.01 RP2.4@-1132.06,2538.01
NetJP4_5: JP4.5 RP2.6 | length 462.6
  Top Layer w20: v1@-1172.06,2398.01 -1172.06,2164.01 JP4.5@-1170.06,2162.01
  Bottom Layer w10: RP2.6@-1332.06,2493.9 RP2.6@-1332.06,2498.01
  Bottom Layer w20: RP2.6@-1330.06,2496.01 -1330.06,2458.01 -1268.06,2396.01 v1(-1172.06,2396.01)
NetJP5_2: JP5.2 RP1.7 RP1.8 | length 1053.8
  Top Layer w10: RP1.8@665.94,1762.01 RP1.8@665.94,1786.01
  Top Layer w20: RP1.7@426.01,1786.01 RP1.8@671.94,1786.01
  Bottom Layer w10: JP5.2@-258.06,1852.01 JP5.2@-256.06,1850.01
  Bottom Layer w20: JP5.2@-260.06,1836.01 -194.06,1770.01 141.94,1770.01 195.94,1716.01 359.94,1716.01 RP1.7@425.94,1782.01 ; JP5.2@-256.06,1832.01 JP5.2@-256.06,1850.01
NetJP5_4: JP5.4 RP2.9 RP2.10 | length 1111.1
  Top Layer w20: RP2.10@-1096.06,1600.01 -856.06,1600.01 v1(-846.06,1610.01)
  Bottom Layer w20: RP2.9@-1334.06,1600.01 RP2.10@-1098.06,1600.01 ; v1(-846.06,1610.01) -846.06,1720.01 -640.06,1926.01 -514.06,1926.01 -452.06,1864 JP5.4@-452.06,1858.01
NetQ1_1: Q1.1 R1.2 | length 108.1
  Bottom Layer w30: R1.2@-1942.06,3506.01 -1848.06,3506.01 Q1.1@-1838.06,3496.01
NetQ1_2: Q1.2 R2.2 | length 131.1
  Bottom Layer w30: Q1.2@-1796.06,3414.01 -1696.06,3414.01 R2.2@-1674.06,3436.01
NetR3_2: R3.2 U3.10 | length 151.3
  Top Layer w10: U3.10@-292.06,2702.01 -292.06,2664.01 -276.06,2648.01 v1(-276.06,2612.01)
  Bottom Layer w10: v1@-274,2602.06 R3.2@-274,2656.76
NetR8_2: R8.2 U5.7
NetR9_2: R9.2 U5.8
NetS19_2: S19.2 U5.6
OSCI: C4.2 U1.3 U2.8 Y1.2 | length 1734.2
  Top Layer w10: C4.2@-121.12,3744.01 -42.06,3744.01 -2.06,3784.01 Y1.2@155.94,3784.01 ; U1.3@407.94,3576.01 U1.3@407.94,3586.01
  Top Layer w12: v1@-400.06,3358.01 -398.06,3360.01 -398.06,3444.01 v1(-346.06,3496.01) ; Y1.2@173.94,3782.01 237.94,3718.01 v1(405.94,3718.01)
  Bottom Layer w10: U2.8@-400.06,3406.01 U2.8@-398.06,3408.01
  Bottom Layer w12: v1@-398.58,3359.48 U2.8@-398.58,3440.01 ; v1(-346.06,3496.01) -304.06,3538.01 369.95,3538.01 405.94,3574 v1(405.94,3718.01)
  other v1: -398.06,3358.01